# Altium PCB Bottom Layer.PcbDoc
Units mm, origin at the board's own origin, x right, y up, seen from the top; angles counter-clockwise.
Board outline 45 x 45 mm, 2 copper layers (Top Layer, Bottom Layer); 15 components, 17 nets, 84 pads, 0 vias.
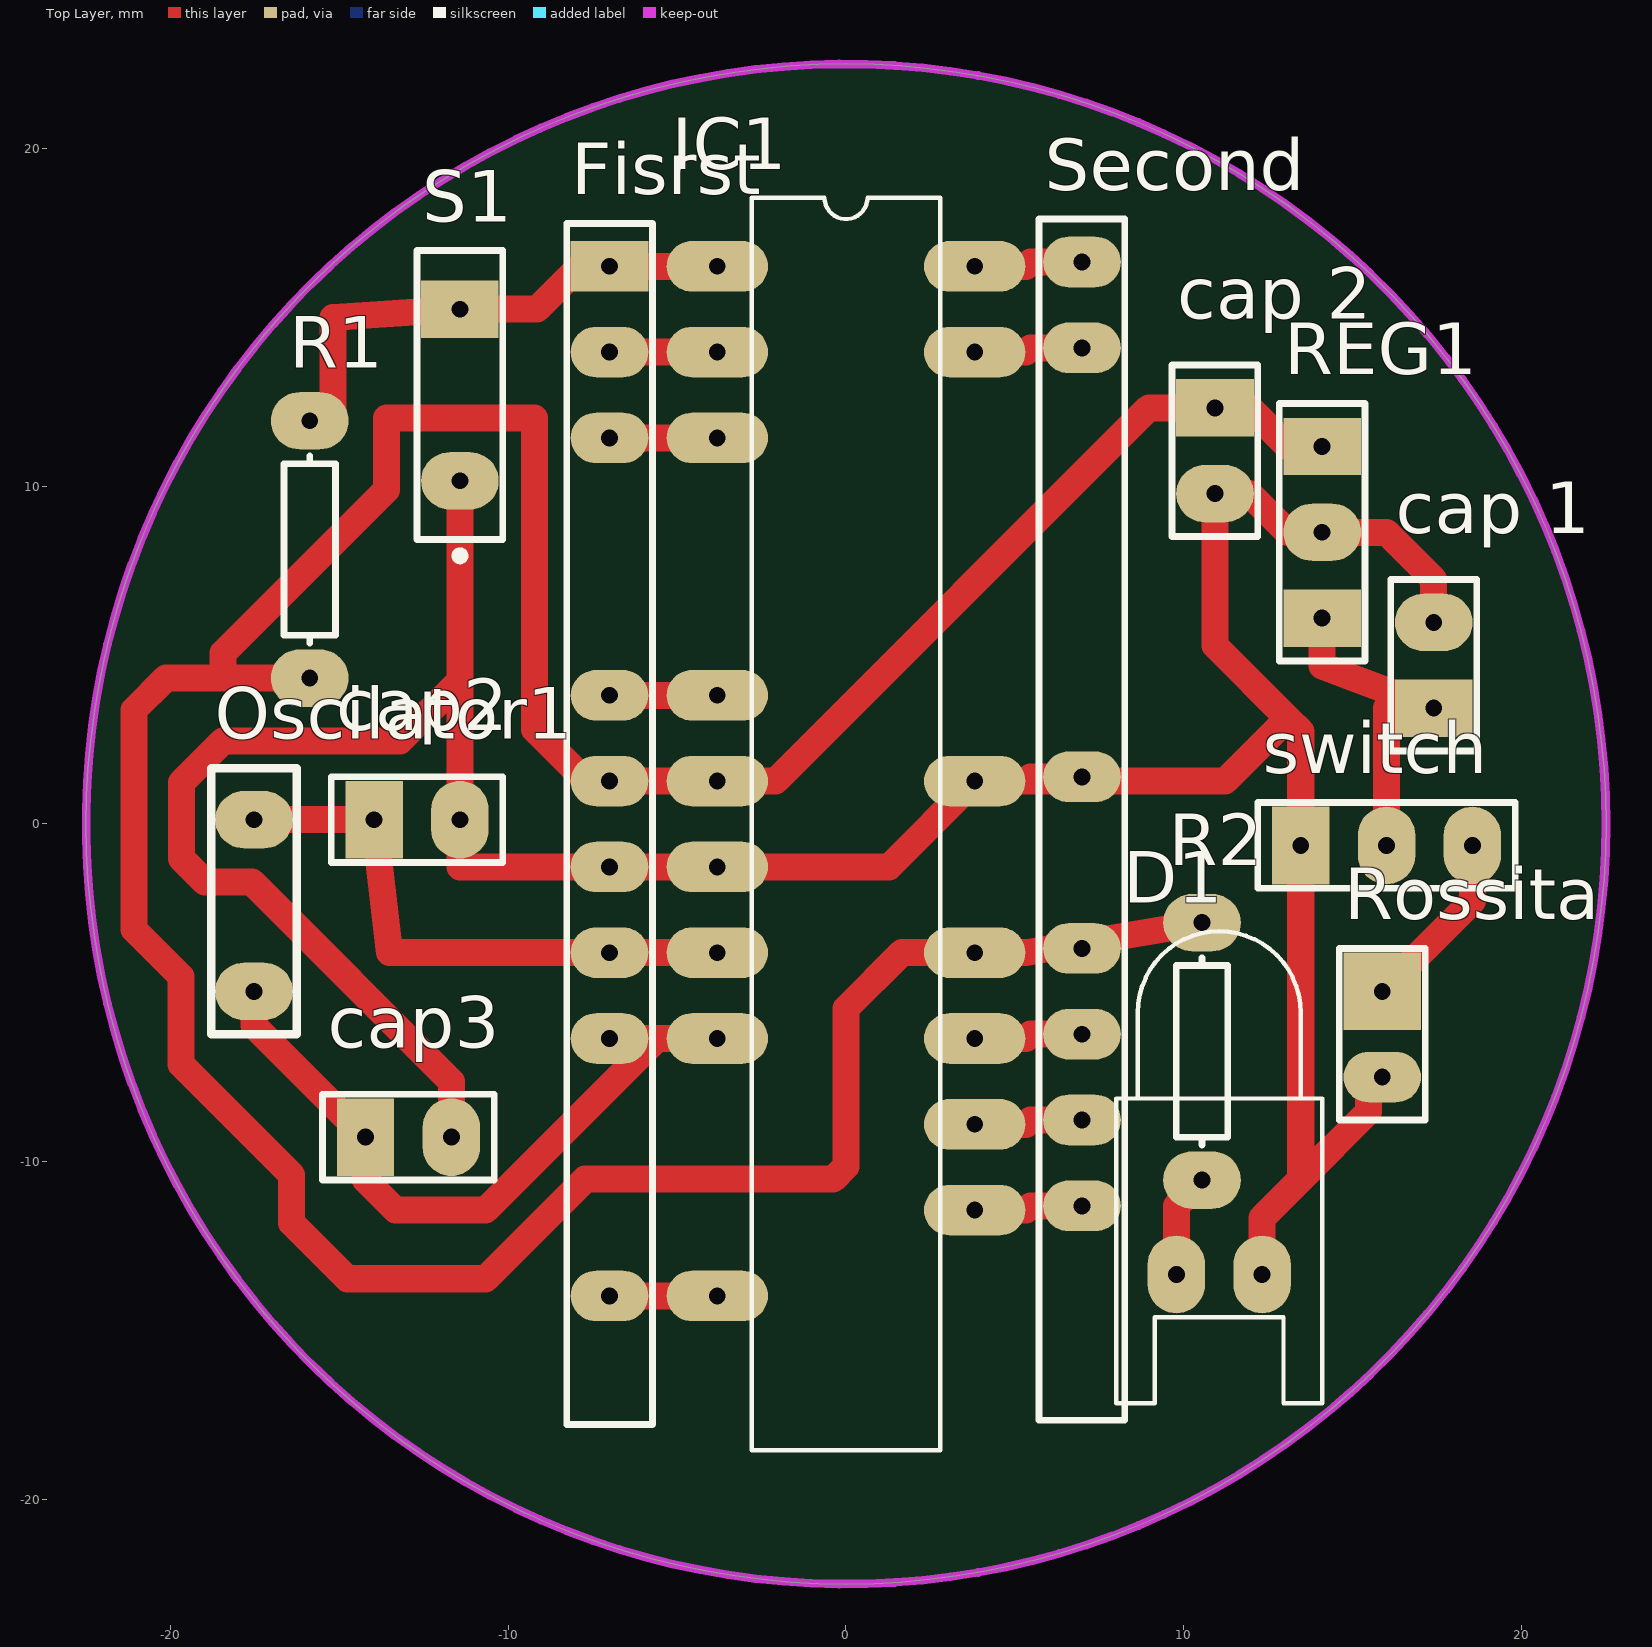
[diagram p0: Top Layer view]
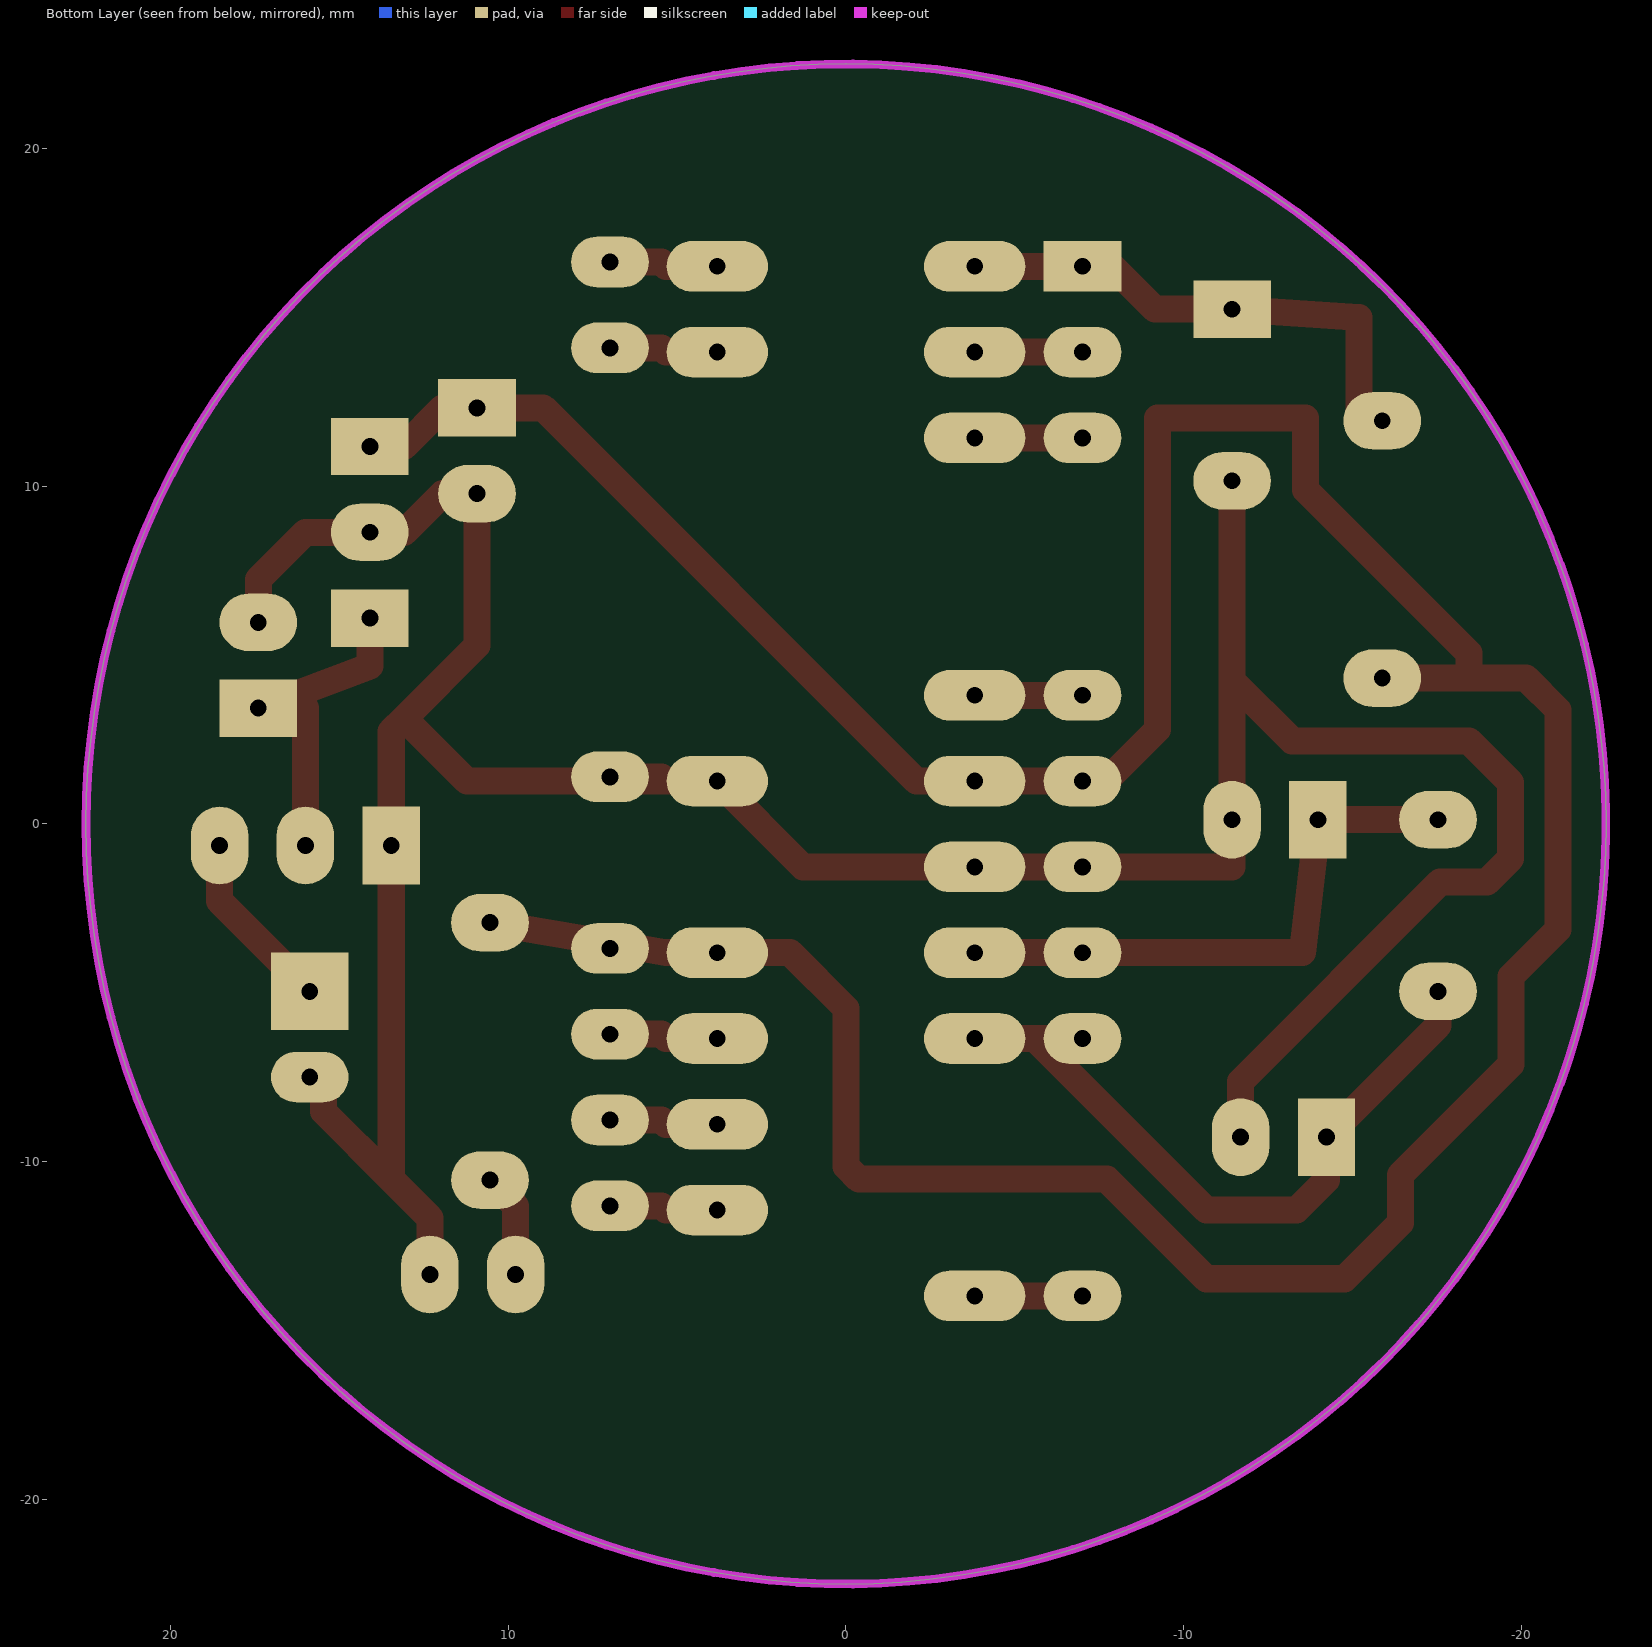
[diagram p1: Bottom Layer view, seen from below]

## Layer stack, top to bottom
Top Solder: solder mask 0.0102, Solder Resist, Dk 3.5
Top Layer: signal copper 0.0356
Dielectric 1: dielectric 0.32, FR-4, Dk 4.8
Bottom Layer: signal copper 0.0356
Bottom Solder: solder mask 0.0102, Solder Resist, Dk 3.5

## Board outline
-22.5,0 ccw(c0,0) 0,-22.5 ccw(c0,0) 22.5,0 ccw(c0,0) 0,22.5 ccw(c0,0)

## Design rules (kind name [scope] priority, off if disabled: settings)
Clearance [All] p1: gap=0.6 ignorepadtopadclearanceinfootprint=FALSE
ComponentClearance [All] p1: gap=0 collisioncheckmode=3 verticalgap=0 showdistances=FALSE
PolygonConnect [All] p1: connectstyle=Relief reliefconductorwidth=0.254 reliefentries=4 polygonreliefangle="90 Angle" airgapwidth=0.254
RoutingLayers [All] p1: top layer_v5=TRUE bottom layer_v5=FALSE
RoutingVias [All] p1: holewidth=0.711 width=1.27 viastyle="Through Hole" minholewidth=0.711 minwidth=1.27 maxholewidth=0.711 maxwidth=1.27
SolderMaskExpansion [All] p1: expansion=0.102
Width [All] p1: maxlimit=1 minlimit=0.5 preferedwidth=0.8 toplayer_minwidth=0.8 bottomlayer_prefwidth=0.7 minimp=50.000000 maximp=50.000000 favimp=50.000000
28 further rules are at their usual default settings.

## Components (designator, comment, footprint, x,y, rotation, side; value= is the part's Value field where it differs from the comment)
cap2 "Header 2" HDR1X2#1 -11.43,0.127 r180 top
cap3 "Header 2" HDR1X2#2 -14.224,-9.271 r0 top
"cap 1" "Header 2" HDR1X2#1 17.399,5.969 r270 top
"cap 2" "Header 2" HDR1X2#1 10.922,9.779 r90 top
D1 "LED0" LED-0 11.049,-13.335 r180 top
Fisrst "Header 14" HDR1X14#1 -7,16.51 r270 top
IC1 "ATMEGA328-PU" *DIL28 0,0 r0 top
Oscilator1 "Oscilator" Oscilator -17.526,0.127 r90 top
R1 "Res1" AXIAL-0.3 -15.875,8.128 r270 top value=1K
R2 "Res1" AXIAL-0.3 10.541,-6.731 r270 top value=1K
REG1 "Header 3" HDR1X3#1 14.097,6.096 r90 top
Rossita "Header 2" HDR1X2#3 15.875,-4.953 r270 top
S1 "SW-PB" SPST-2 -11.43,12.7 r90 top
Second "Header 14" HDR1X14#2 6.985,-16.383 r90 top
switch "Header 3" HDR1X3#2 13.462,-0.635 r0 top

## Footprints (in the part's own frame and the unit in brackets; to place one, negate y for a bottom-side part, rotate by r counter-clockwise, add the part's x,y. Pads: shape width x height; smd on the part's side, far side on the other; paste and mask are expansions set on the pad)
*DIL28 [mm]
  oval 3x1.5 hole 0.5: 1(-3.81,16.51) 2(-3.81,13.97) 3(-3.81,11.43) 6(-3.81,3.81) 7(-3.81,1.27) 8(-3.81,-1.27) 9(-3.81,-3.81) 10(-3.81,-6.35) 17(3.81,-11.43) 18(3.81,-8.89) 19(3.81,-6.35) 20(3.81,-3.81) 22(3.81,1.27) 27(3.81,13.97) 28(3.81,16.51)
  round 0 all layers, no hole: 4(-3.81,8.89) 5(-3.81,6.35) 11(-3.81,-8.89) 12(-3.81,-11.43) 13(-3.81,-13.97) 14(-3.81,-16.51) 15(3.81,-16.51) 16(3.81,-13.97) 21(3.81,-1.27) 23(3.81,3.81) 24(3.81,6.35) 25(3.81,8.89) 26(3.81,11.43)
  silkscreen extent -2.79,-18.54 2.79,18.54, body extent -5.05,-17.9 4.95,17.65, height 8.1
AXIAL-0.3 [mm] "Axial Device, Thru-Hole; 2 Leads; 0.3 in Pin Spacing"
  oval 1.7x2.3 hole 0.5: 1(-3.81,0) 2(3.81,0)
  silkscreen extent -2.77,-0.76 2.77,0.76
HDR1X2#1 [mm] "Connector; Header; 2 Position"
  oval 1.7x2.3 hole 0.5: 1(0,0)
  rect 1.7x2.3 hole 0.5: 2(2.54,0)
  silkscreen extent -1.27,-1.27 3.81,1.27
HDR1X2#2 [mm] "Connector; Header; 2 Position"
  rect 1.7x2.3 hole 0.5: 1(0,0)
  oval 1.7x2.3 hole 0.5: 2(2.54,0)
  silkscreen extent -1.27,-1.27 3.81,1.27
HDR1X2#3 [mm] "Connector; Header; 2 Position"
  rect 2.3x2.3 hole 0.5: 1(0,0)
  oval 1.5x2.3 hole 0.5: 2(2.54,0)
  silkscreen extent -1.27,-1.27 3.81,1.27
HDR1X3#1 [mm] "Connector; Header; 3 Position"
  rect 1.7x2.3 hole 0.5: 1(0,0) 3(5.08,0)
  oval 1.7x2.3 hole 0.5: 2(2.54,0)
  silkscreen extent -1.27,-1.27 6.35,1.27
HDR1X3#2 [mm] "Connector; Header; 3 Position"
  rect 1.7x2.3 hole 0.5: 1(0,0)
  oval 1.7x2.3 hole 0.5: 2(2.54,0) 3(5.08,0)
  silkscreen extent -1.27,-1.27 6.35,1.27
HDR1X14#1 [mm] "Connector; Header; 14 Position"
  rect 1.5x2.3 hole 0.5: 1(0,0)
  oval 1.5x2.3 hole 0.5: 2(2.54,0) 3(5.08,0) 6(12.7,0) 7(15.24,0) 8(17.78,0) 9(20.32,0) 10(22.86,0)
  round 0 all layers, no hole: 4(7.62,0) 5(10.16,0) 11(25.4,0) 12(27.94,0) 13(30.48,0) 14(33.02,0)
  silkscreen extent -1.27,-1.27 34.29,1.27
HDR1X14#2 [mm] "Connector; Header; 14 Position"
  rect 0x0 all layers, no hole: 1(0,0)
  round 0 all layers, no hole: 2(2.54,0) 7(15.24,0) 9(20.32,0) 10(22.86,0) 11(25.4,0) 12(27.94,0)
  oval 1.5x2.3 hole 0.5: 3(5.08,0) 4(7.62,0) 5(10.16,0) 6(12.7,0) 8(17.78,0) 13(30.48,0) 14(33.02,0)
  silkscreen extent -1.27,-1.27 34.29,1.27
LED-0 [mm] "LED; 2 Leads"
  oval 1.7x2.3 hole 0.5: 1(1.27,0) 2(-1.27,0)
  silkscreen extent -3.05,-10.16 3.05,3.81
Oscilator [mm]
  oval 1.7x2.3 hole 0.5: Oscilator1(0,0) Oscilator2(-5.08,0)
  silkscreen extent -6.35,-1.27 1.52,1.27
SPST-2 [mm] "Switch; 2 Leads"
  oval 1.7x2.3 hole 0.5: 1(-2.54,0)
  rect 1.7x2.3 hole 0.5: 2(2.54,0)
  silkscreen extent -4.89,-1.27 4.28,1.27

## Part data
cap2 cap3 "cap 1" "cap 2" Rossita: "Header, 2-Pin", LatestRevisionDate=17-Jul-2002, LatestRevisionNote="Re-released for DXP Platform.", Publisher="Altium Limited"
D1: "Typical INFRARED GaAs LED", LatestRevisionDate=08-Jul-2005, LatestRevisionNote="Mech Layer 1 removed.", PackageDescription="LED; 2 Leads", PackageReference=LED-0, Published=8-Jun-2000, Publisher="Altium Limited"
Fisrst Second: "Header, 14-Pin", LatestRevisionDate=17-Jul-2002, LatestRevisionNote="Re-released for DXP Platform.", Publisher="Altium Limited"
IC1: "ATmega Series 20 MHz 32 KB Flash 2 KB SRAM 8-Bit Microcontroller - DIP-28", Package="PDIP-28 Microchip", Availability=Unavailable, MF=Microchip, MP=ATMEGA328-PU, Price=None, SnapEDA_Link=https://www.snapeda.com/parts/ATMEGA328-PU/Microchip/view-part/?ref=snap
Oscilator1: library part Component_1
R1 R2: "Resistor", LatestRevisionDate=17-Jul-2002, LatestRevisionNote="Re-released for DXP Platform.", PackageDescription="Axial Device, Thru-Hole; 2 Leads; 0.3 in Pin Spacing", PackageReference=AXIAL-0.3, Published=8-Jun-2000, Publisher="Altium Limited"
REG1 switch: "Header, 3-Pin", LatestRevisionDate=17-Jul-2002, LatestRevisionNote="Re-released for DXP Platform.", Publisher="Altium Limited"
S1: "Switch", LatestRevisionDate=17-Jul-2002, LatestRevisionNote="Re-released for DXP Platform.", PackageDescription="Switch; 2 Leads", PackageReference=SPST-2, Published=24-Mar-1999, Publisher="Altium Limited"

## Free pads (board coordinates)
  oval 3x1.5 hole 0.5: 2(-3.81,-13.97)
  oval 2.3x1.5 hole 0.5: 3(-7,-13.97)

## Nets (pads, with @x,y where several pads share a name; then routed paths per layer and width w, separated by ;. In a path a pad name is that pad's centre, name@x,y a point inside that pad or via, vN(x,y) a via of type N, cw(c..) or ccw(c..) an arc to the next point about the centre after c; other vN are vias at no path point)
"5 volt": "cap 2.2" Fisrst.7 IC1.7 IC1.20 R1.2 R2.1 REG1.3 Second.6 | length 110.4
  Top Layer w0.8: R1.2 -18.436,4.318 ; Second.6 Second.6@6.078,-3.683 ; R2.1 6.959,-3.533 Second.6@6.078,-3.683 ; REG1.3 13.081,11.176 11.938,12.319 10.922,12.319 8.966,12.319 -2.083,1.27 IC1.7 Fisrst.7 -7.696,1.27 -9.22,2.794 -9.22,12.014 -13.609,12.014 -13.609,9.886 -18.436,5.059 -18.436,4.318 ; -18.436,4.318 -20.135,4.318 -21.076,3.377 -21.076,-3.123 -19.685,-4.514 -19.685,-7.112 -16.408,-10.389 -16.408,-11.811 -15.265,-12.954 -15.037,-13.183 -14.757,-13.462 -10.668,-13.462 -7.722,-10.516 -0.381,-10.516 0,-10.135 0,-5.461 1.651,-3.81 IC1.20 5.334,-3.81 Second.6@6.078,-3.683
BATTERY: Rossita.1 switch.3 | length 5.4
  Top Layer w0.8: Rossita.1 18.542,-2.286 switch.3
CS: Fisrst.6 IC1.6 | length 3.2
  Top Layer w0.8: Fisrst.6 IC1.6
DHT_Data: Fisrst.13 IC1.13 pad.2 pad.3 | length 3.2
  Top Layer w0.8: pad.3@-6.985,-13.97 pad.2
GND: "cap 1.1" "cap 2.1" cap2.1 cap3.2 D1.2 Fisrst.8 IC1.8 IC1.22 REG1.2 Rossita.2 S1.1 Second.8 switch.1 | length 101.3
  Top Layer w0.8: cap3.2 -11.684,-7.62 -17.581,-1.723 -18.969,-1.723 -19.676,-1.016 -19.676,1.224 -18.436,2.464 -13.208,2.464 -11.43,4.242 ; S1.1 -11.43,4.242 ; Second.8 5.461,1.397 5.334,1.27 ; D1.2 12.319,-11.659 13.462,-10.516 ; Rossita.2 15.469,-7.493 15.469,-8.509 13.462,-10.516 ; 17.399,5.969 17.399,7.239 16.002,8.636 REG1.2 13.081,8.636 11.938,9.779 10.922,9.779 10.922,5.283 13.081,3.124 ; -11.43,4.242 cap2.1 -11.43,-1.27 Fisrst.8 IC1.8 1.27,-1.27 IC1.22 5.334,1.27 ; 5.334,1.27 11.227,1.27 13.081,3.124 ; 13.081,3.124 13.462,2.743 switch.1 13.462,-10.516
MISO: IC1.18 Second.4 | length 3.2
  Top Layer w0.8: IC1.18 5.334,-8.89 5.461,-8.763 Second.4
MOSI: IC1.17 Second.3 | length 3.2
  Top Layer w0.8: IC1.17 5.334,-11.43 5.461,-11.303 Second.3
NetD1_1: D1.1 R2.2 | length 3.1
  Top Layer w0.8: D1.1 9.779,-11.303 R2.2
"OSCILATOR 1": cap2.2 Fisrst.9 IC1.9 Oscilator1.Oscilator1 | length 17.2
  Top Layer w0.8: Oscilator1.Oscilator1 cap2.2 -13.513,-3.81 Fisrst.9 -5.41,-3.81 IC1.9
"OSCILATOR 2": cap3.1 Fisrst.10 IC1.10 Oscilator1.Oscilator2 | length 21.3
  Top Layer w0.8: Oscilator1.Oscilator2 -17.526,-5.969 cap3.1 -14.224,-10.541 -13.335,-11.43 -10.668,-11.43 -5.588,-6.35 ; Fisrst.10 -5.588,-6.35 ; IC1.10 -5.41,-6.35 -5.588,-6.35
RESET: Fisrst.1 IC1.1 R1.1 S1.2 | length 15.7
  Top Layer w0.8: R1.1 -15.18,11.938 -15.18,14.995 S1.2 -9.144,15.24 -7.874,16.51 Fisrst.1 -5.41,16.51 IC1.1
RX: Fisrst.2 IC1.2 | length 3.2
  Top Layer w0.8: Fisrst.2 IC1.2
SCK: IC1.19 Second.5 | length 3.2
  Top Layer w0.8: IC1.19 5.334,-6.35 5.461,-6.223 Second.5
SCL: IC1.28 Second.14 | length 3.2
  Top Layer w0.8: IC1.28 5.334,16.51 5.461,16.637 Second.14
SDA: IC1.27 Second.13 | length 3.2
  Top Layer w0.8: IC1.27 5.334,13.97 5.461,14.097 Second.13
"Switch out": "cap 1.2" REG1.1 switch.2 | length 10.4
  Top Layer w0.8: REG1.1 14.097,4.674 17.399,3.429 16.002,3.429 switch.2
TX: Fisrst.3 IC1.3 | length 3.2
  Top Layer w0.8: Fisrst.3 IC1.3
pads on no net: Fisrst.4 Fisrst.5 Fisrst.11 Fisrst.12 Fisrst.14 IC1.4 IC1.5 IC1.11 IC1.12 IC1.14 IC1.15 IC1.16 IC1.21 IC1.23 IC1.24 IC1.25 IC1.26 Second.1 Second.2 Second.7 Second.9 Second.10 Second.11 Second.12

## Keep-outs
Keep-Out Layer:
  circle w0.254: c0,0 r22.5